# Altium PCB elec_connector.PcbDoc
Units mil, origin at the board's own origin, x right, y up, seen from the top; angles counter-clockwise.
Board outline 6000 x 4000 mil, 2 copper layers (Top Layer, Bottom Layer); 3 components, 17 nets, 40 pads, 0 vias.
Unrouted connection lines stored in the file: 1.
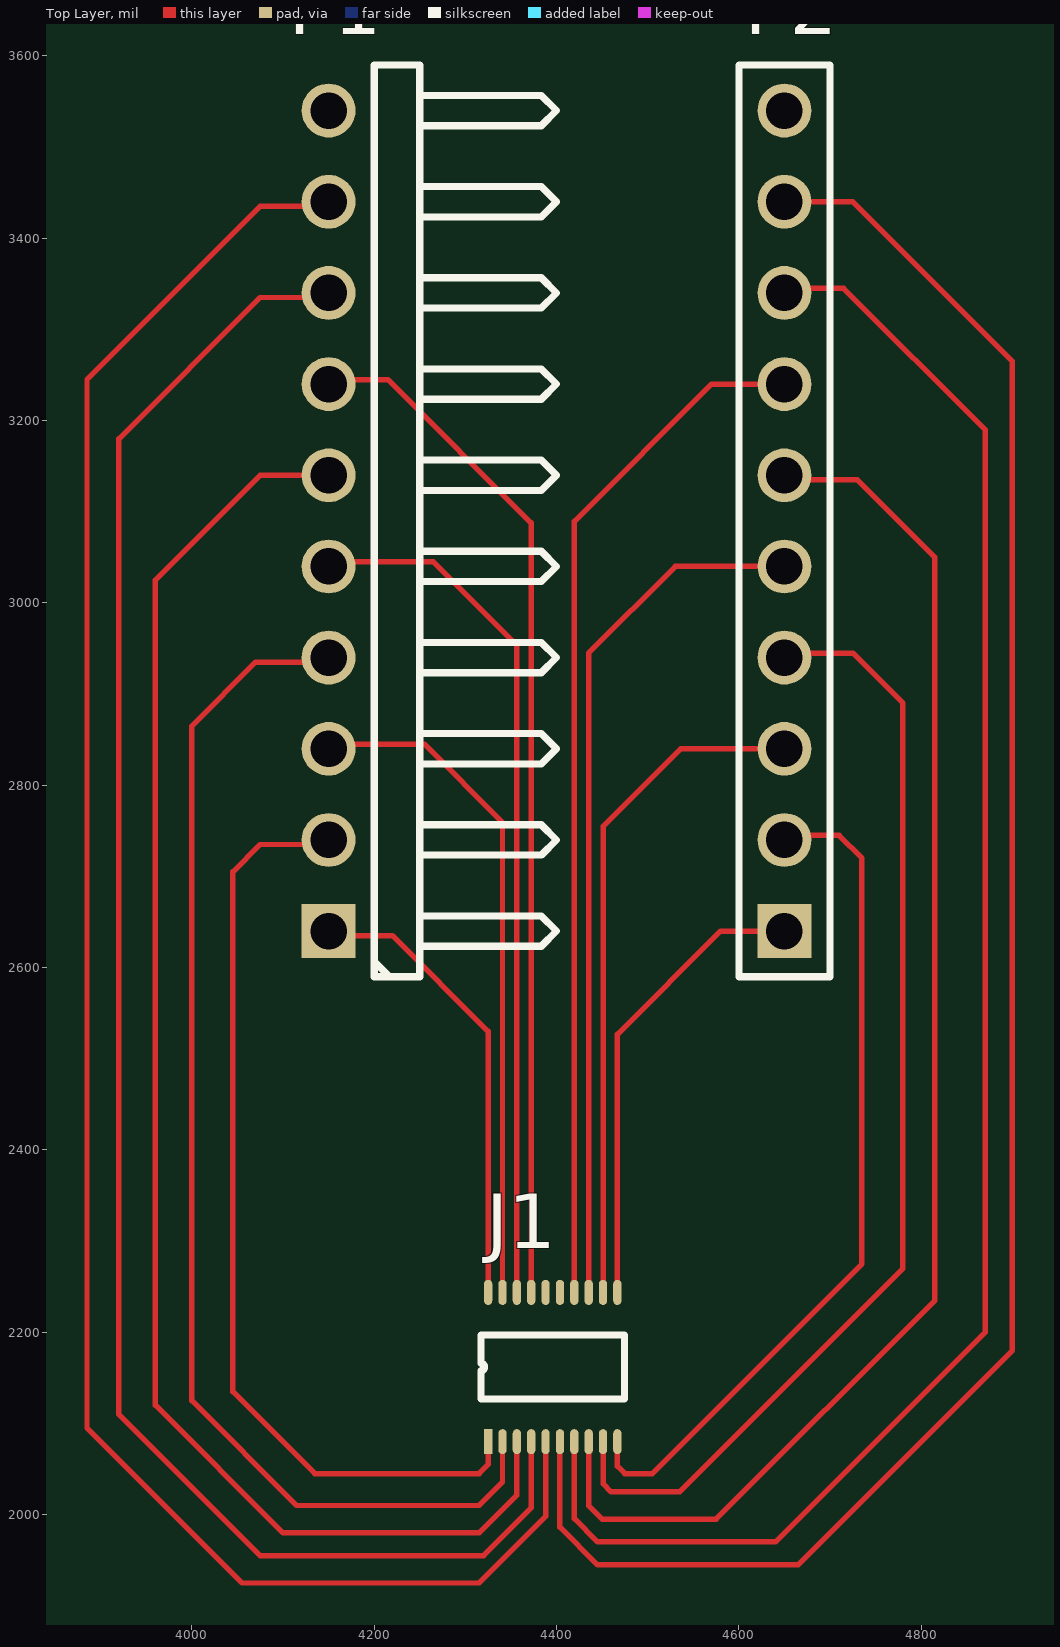
[diagram p0: Top Layer view]
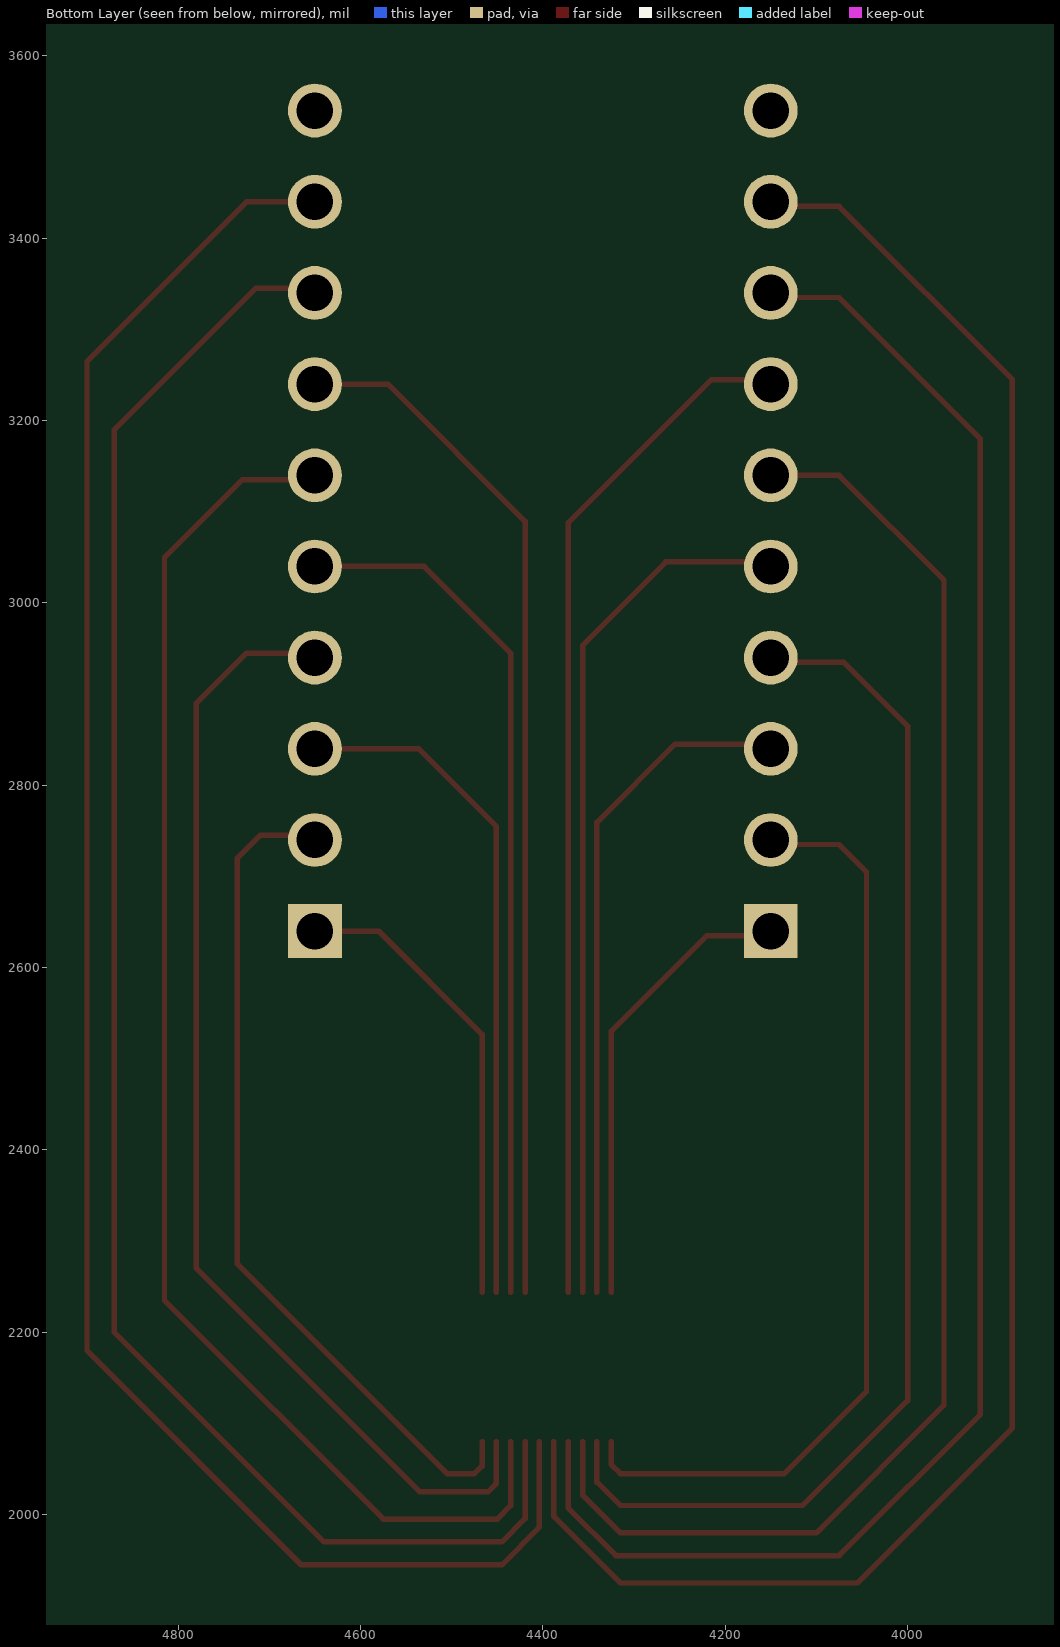
[diagram p1: Bottom Layer view, seen from below]

## Layer stack, top to bottom
Top Layer: signal copper 1.4
Dielectric: dielectric 12.6, FR-4, Dk 4.8
Bottom Layer: signal copper 1.4

## Board outline
1000,1000 7000,1000 7000,5000 1000,5000

## Design rules (kind name [scope] priority, off if disabled: settings)
Clearance Plane_pad_clear [IsPad vs InPolygon] p1: gap=12
Clearance "plane clear" [InPolygon vs InNetClass('All Nets')] p2: gap=10
Clearance clearance1 [All] p3: gap=6
ComponentClearance [All] p1: gap=6 collisioncheckmode=3 verticalgap=0 showdistances=TRUE
Height [All] p1 off: minheight=0 maxheight=1000 prefheight=500
HoleSize [All] p1: absolutevalues=TRUE maxlimit=100 minlimit=10 maxpercent=80.000 minpercent=20.000
HoleToHoleClearance [All] p1: gap=6 allowstackedmicrovias=TRUE
MinimumSolderMaskSliver [All] p1: minsoldermaskwidth=6
PlaneClearance [All] p1: clearance=15
PlaneConnect [All] p1: planeconnectstyle=Direct reliefexpansion=20 reliefentries=4 reliefconductorwidth=10 reliefairgap=10
PolygonConnect [All] p1: connectstyle=Relief reliefconductorwidth=20 reliefentries=4 polygonreliefangle="90 Angle"
RoomDefinition elec_connector [InComponentClass('elec_connector')] p1: confinementstyle=ConfineIn formatcopy=TRUE lockcomponents=FALSE outline 0,0 2000,0 2000,1000 0,1000
RoutingCorners [All] p1: cornerstyle=45-Degree minsetback=20 maxsetback=20
RoutingVias [All] p1: holewidth=12 width=22 viastyle="Through Hole" minholewidth=12 minwidth=22 maxholewidth=30 maxwidth=50
SilkscreenOverComponentPads [OnLayer('Mechanical 13') vs OnLayer('Mechanical 15')] p1: minsilkscreentomaskgap=10
SolderMaskExpansion [All] p1: expansion=0
Width Width_v3p0 [InNet('V3P0')] p1: maxlimit=50 minlimit=6 preferedwidth=10
Width [All] p2: maxlimit=30 minlimit=6 preferedwidth=6
19 further rules are at their usual default settings.

## Components (designator, comment, footprint, x,y, rotation, side; value= is the part's Value field where it differs from the comment)
J1 "DF30FC-20DS" DF30FC-20DS 4325,2080 r90 top
P1 "Header 10" HDR1X10H 4150,2640 r90 top
P2 "Header 10" HDR1X10 4650,2640 r90 top

## Footprints (in the part's own frame and the unit in brackets; to place one, negate y for a bottom-side part, rotate by r counter-clockwise, add the part's x,y. Pads: shape width x height; smd on the part's side, far side on the other; paste and mask are expansions set on the pad)
DF30FC-20DS [mm]
  rect 0.7x0.23 smd: 1(0,0)
  oval 0.7x0.23 smd: 2(0,-0.4) 3(0,-0.8) 4(0,-1.2) 5(0,-1.6) 6(0,-2) 7(0,-2.4) 8(0,-2.8) 9(0,-3.2) 10(0,-3.6) 11(4.16,-3.6) 12(4.16,-3.2) 13(4.16,-2.8) 14(4.16,-2.4) 15(4.16,-2) 16(4.16,-1.6) 17(4.16,-1.2) 18(4.16,-0.8) 19(4.16,-0.4) 20(4.16,0)
  silkscreen extent 1.18,-3.8 2.98,0.2
HDR1X10 [mm] "Connector; Header; 10 Position"
  rect 1.5x1.5 hole 1.016: 1(0,0)
  round 1.5 hole 1.016: 2(2.54,0) 3(5.08,0) 4(7.62,0) 5(10.16,0) 6(12.7,0) 7(15.24,0) 8(17.78,0) 9(20.32,0) 10(22.86,0)
  silkscreen extent -1.27,-1.27 24.13,1.27
HDR1X10H [mm] "Connector; Header; 10 Position; Right Angle"
  rect 1.5x1.5 hole 1.016: 1(0,0)
  round 1.5 hole 1.016: 2(2.54,0) 3(5.08,0) 4(7.62,0) 5(10.16,0) 6(12.7,0) 7(15.24,0) 8(17.78,0) 9(20.32,0) 10(22.86,0)
  silkscreen extent -1.27,-6.35 24.13,-1.27

## Part data
J1: library part DF30FC-20DP
P1 P2: "Header, 10-Pin"

## Nets (pads, with @x,y where several pads share a name; then routed paths per layer and width w, separated by ;. In a path a pad name is that pad's centre, name@x,y a point inside that pad or via, vN(x,y) a via of type N, cw(c..) or ccw(c..) an arc to the next point about the centre after c; other vN are vias at no path point)
ELEC1: J1.7 P2.8 | length 1917.1
  Top Layer w6: J1.7 4419.49,1995.51 4445,1970 4640,1970 4870,2200 4870,3190 4715,3345 4655,3345 P2.8
ELEC2: J1.8 P2.6 | length 1572.8
  Top Layer w6: J1.8 4435.24,2009.76 4450,1995 4575,1995 4815,2235 4815,3050 4730,3135 4655,3135 P2.6
ELEC3: J1.9 P2.4 | length 1255.1
  Top Layer w6: J1.9 4450.98,2034.02 4460,2025 4535,2025 4780,2270 4780,2890 4725,2945 4655,2945 P2.4
ELEC4: J1.10 P2.2 | length 936.1
  Top Layer w6: J1.10 4466.73,2053.27 4475,2045 4505,2045 4735,2275 4735,2720 4710,2745 4655,2745 P2.2
ELEC5: J1.11 P2.1 | length 513.1
  Top Layer w6: J1.11 4466.73,2526.73 4580,2640 P2.1
ELEC6: J1.12 P2.3 | length 745.4
  Top Layer w6: J1.12 4450.98,2755 4535.98,2840 P2.3
ELEC7: J1.13 P2.5 | length 955.3
  Top Layer w6: J1.13 4435.24,2945 4530.24,3040 P2.5
ELEC8: J1.14 P2.7 | length 1138.6
  Top Layer w6: J1.14 4419.49,3089.49 4570,3240 P2.7
ELEC9: J1.17 P1.7 | length 1133.4
  Top Layer w6: P1.7 4155,3245 4215,3245 4372.24,3087.76 J1.17
ELEC10: J1.18 P1.5 | length 956.2
  Top Layer w6: P1.5 4155,3045 4265,3045 4356.5,2953.5 J1.18
ELEC11: J1.19 P1.3 | length 743.8
  Top Layer w6: P1.3 4155,2845 4255,2845 4340.75,2759.25 J1.19
ELEC12: J1.20 P1.1 | length 506.8
  Top Layer w6: P1.1 4155,2635 4220,2635 4325,2530 J1.20
ELEC13: J1.1 P1.2 | length 1035.9
  Top Layer w6: P1.2 4145,2735 4075,2735 4045,2705 4045,2135 4135,2045 4315,2045 4325,2055 J1.1
ELEC14: J1.2 P1.4 | length 1364.4
  Top Layer w6: P1.4 4145,2935 4070,2935 4000,2865 4000,2125 4115,2010 4315,2010 4340.75,2035.75 J1.2
ELEC15: J1.3 P1.6 | length 1672.8
  Top Layer w6: P1.6 4075,3140 3960,3025 3960,2120 4100,1980 4315,1980 4356.5,2021.5 J1.3
ELEC16: J1.4 P1.8 | length 1977.1
  Top Layer w6: P1.8 4145,3335 4075,3335 3920,3180 3920,2110 4075,1955 4320,1955 4372.24,2007.24 J1.4
ELEC_REF: J1.5 J1.6 P1.9 P2.9 | length 4293.3
  Top Layer w6: P1.9 4145,3435 4075,3435 3885,3245 3885,2095 4055,1925 4315,1925 4387.99,1997.99 J1.5 ; J1.6 4403.74,1986.26 4445,1945 4665,1945 4900,2180 4900,3265 4725,3440 P2.9
pads on no net: J1.15 J1.16 P1.10 P2.10